# Altium PCB Baby_Temp_Monitor.PcbDoc
Units mm, origin at the board's own origin, x right, y up, seen from the top; angles counter-clockwise.
Board outline 62.86 x 53.47 mm, 2 copper layers (Top Layer, Bottom Layer); 17 components, 17 nets, 68 pads, 8 vias.
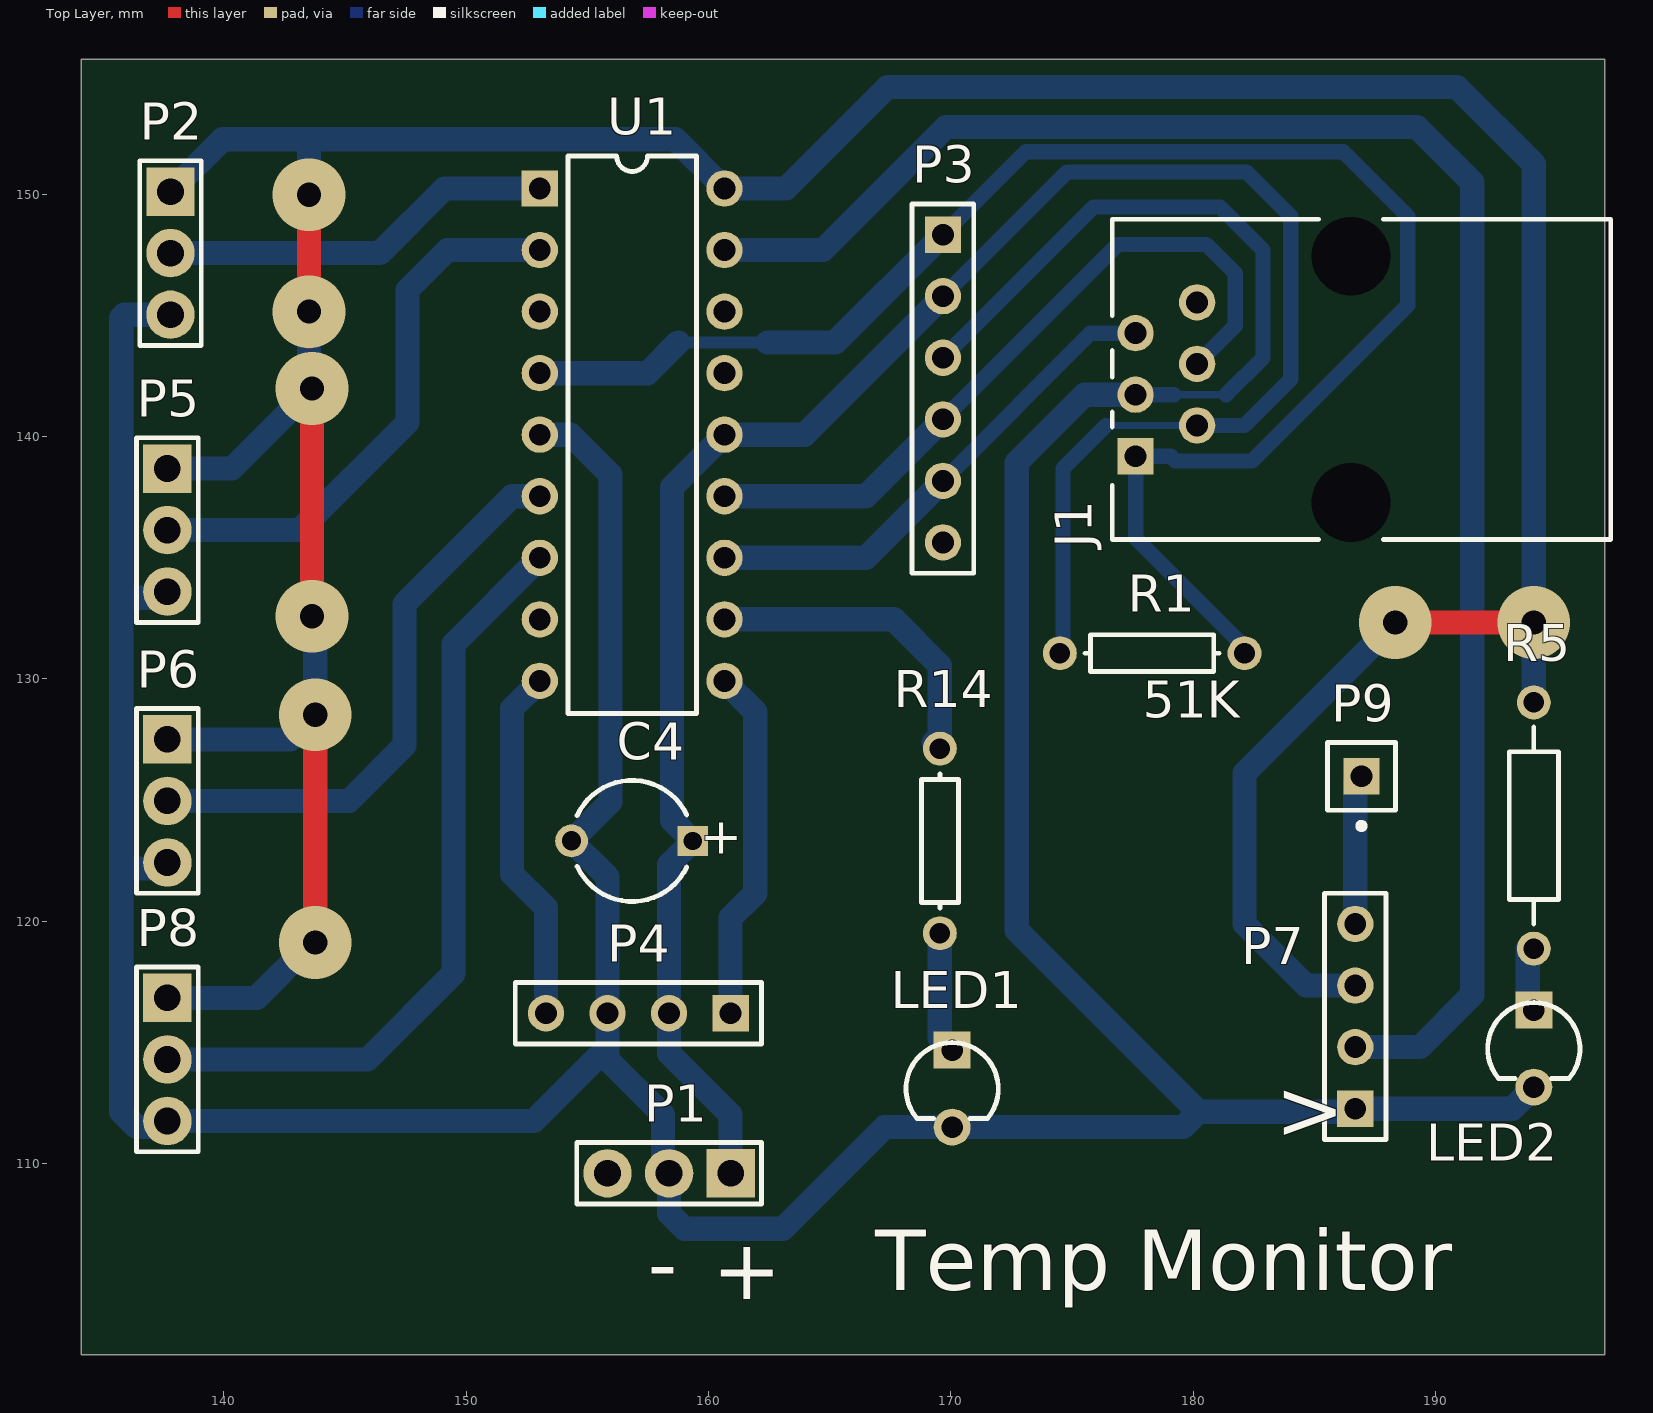
[diagram p0: Top Layer view]
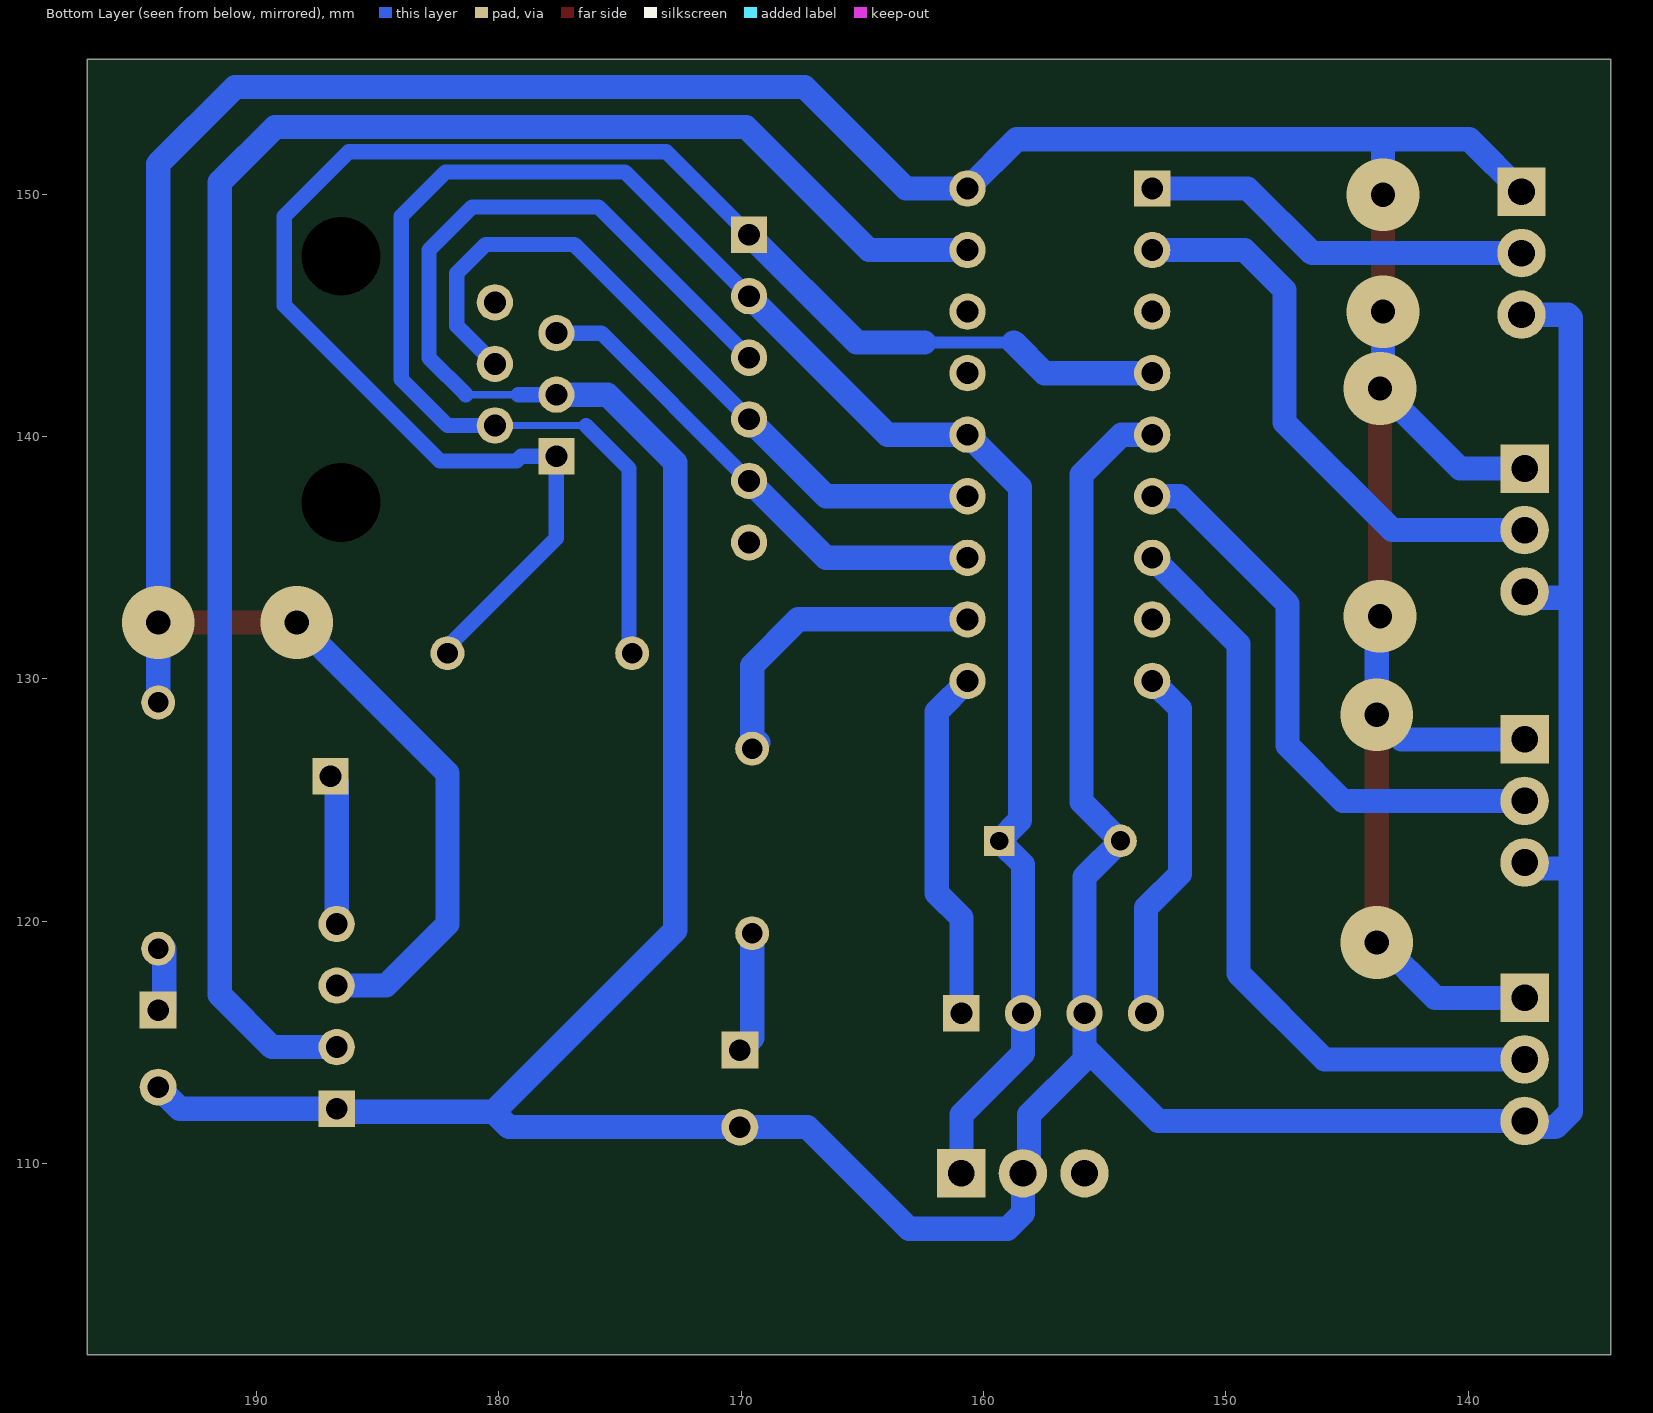
[diagram p1: Bottom Layer view, seen from below]

## Layer stack, top to bottom
Top Layer: signal copper 0.0356
Dielectric: dielectric 0.32, FR-4, Dk 4.8
Bottom Layer: signal copper 0.0356

## Board outline
134.112,102.108 196.977,102.108 196.977,155.575 134.112,155.575

## Design rules (kind name [scope] priority, off if disabled: settings)
Clearance [All] p1: gap=0.203
ComponentClearance [All] p1: gap=0.254 collisioncheckmode=3 verticalgap=0.254
ComponentClearance ComponentClearance_1 [All] p2: gap=0.254 collisioncheckmode=0 verticalgap=0.254
FanoutControl Fanout_LCC [IsLCC] p1: bgadir=Out bgaviamode=Centered fanoutstyle=Auto fanoutdirection=Alternating viagrid=0.025 // Fanout_LCC (Default Rule)
FanoutControl Fanout_BGA [IsBGA] p2: bgadir=Out bgaviamode=Centered fanoutstyle=Auto fanoutdirection=Alternating viagrid=0.025 // Fanout_BGA (Default Rule)
FanoutControl Fanout_Small [(CompPinCount < 5)] p3: bgadir=Out bgaviamode=Centered fanoutstyle=Auto fanoutdirection=OutThenIn viagrid=0.025 // Fanout_Small (Default Rule)
FanoutControl Fanout_SOIC [IsSOIC] p4: bgadir=Out bgaviamode=Centered fanoutstyle=Auto fanoutdirection=Alternating viagrid=0.025 // Fanout_SOIC (Default Rule)
FanoutControl Fanout_BGA_1 [IsBGA] p6: bgadir=Out bgaviamode=Centered fanoutstyle=Auto fanoutdirection=Alternating viagrid=0.025 // Fanout_BGA (Default Rule)
FanoutControl Fanout_LCC_1 [IsLCC] p7: bgadir=Out bgaviamode=Centered fanoutstyle=Auto fanoutdirection=Alternating viagrid=0.025 // Fanout_LCC (Default Rule)
FanoutControl Fanout_SOIC_1 [IsSOIC] p8: bgadir=Out bgaviamode=Centered fanoutstyle=Auto fanoutdirection=Alternating viagrid=0.025 // Fanout_SOIC (Default Rule)
FanoutControl Fanout_Small_1 [(CompPinCount < 5)] p9: bgadir=Out bgaviamode=Centered fanoutstyle=Auto fanoutdirection=OutThenIn viagrid=0.025 // Fanout_Small (Default Rule)
FanoutControl Fanout_Default_1 [All] p10: bgadir=Out bgaviamode=Centered fanoutstyle=Auto fanoutdirection=Alternating viagrid=0.025 // Fanout_Default (Default Rule)
Height Height_1 [All] p2: minheight=0 maxheight=25.4 prefheight=12.7
HoleSize HoleSize_1 [All] p2: absolutevalues=TRUE maxlimit=2.54 minlimit=0.025 maxpercent=80.000 minpercent=20.000
LayerPairs LayerPairs_1 [All] p2: enforce=TRUE
PasteMaskExpansion PasteMaskExpansion_1 [All] p2: expansion=0
PlaneClearance PlaneClearance_1 [All] p2: clearance=0.508
PolygonConnect [All] p1: connectstyle=Relief reliefconductorwidth=0.254 reliefentries=4 polygonreliefangle="90 Angle"
PolygonConnect PolygonConnect_1 [All] p2: connectstyle=Relief reliefconductorwidth=0.254 reliefentries=4 polygonreliefangle="90 Angle"
RoutingLayers [All] p1: top layer_v5=FALSE bottom layer_v5=TRUE
RoutingPriority RoutingPriority_1 [All] p2: routingpriority=0
RoutingTopology RoutingTopology_1 [All] p2: topology=Shortest
RoutingVias [All] p1: holewidth=1 width=3 viastyle="Through Hole" minholewidth=1 minwidth=2 maxholewidth=1 maxwidth=3
ShortCircuit ShortCircuit_1 [All] p2: allowed=FALSE
SolderMaskExpansion [All] p1: expansion=0.102
SolderMaskExpansion SolderMaskExpansion_1 [All] p2: expansion=0.102
TestPointUsage [All] p1: valid=0 allowmultiple=FALSE
TestPointUsage TestPointUsage_1 [All] p2: valid=0 allowmultiple=FALSE
Testpoint [All] p1: side=15 testpointundercomponent=TRUE minsize=1.016 maxsize=2.54 preferedsize=1.524 minholesize=0 maxholesize=1.016 preferedholesize=0.813 testpointgrid=0.025 style=1023 order=0123456789
Testpoint Testpoint_1 [All] p2: side=15 testpointundercomponent=TRUE minsize=1.016 maxsize=2.54 preferedsize=1.524 minholesize=0 maxholesize=1.016 preferedholesize=0.813 testpointgrid=0.025 style=1023 order=0123456789
UnRoutedNet UnRoutedNet_1 [All] p2:
Width [All] p1: maxlimit=1 minlimit=0.305 preferedwidth=1 minimp=50.000000 maximp=50.000000 favimp=50.000000
12 further rules are at their usual default settings.

## Components (designator, comment, footprint, x,y, rotation, side; value= is the part's Value field where it differs from the comment)
C4 "0.1uF" CAPPR5-5x5 156.845,123.317 r180 top
J1 "95009-2667" 95009-2667 197.231,142.367 r90 top
LED1 "LED_3mm" "LED-Polarized - 3mm" 170.053,114.681 r270 top
LED2 "LED_3mm" "LED-Polarized - 3mm" 194.056,116.332 r270 top
P1 "Header 3" HDR1X3 160.909,109.601 r180 top
P2 "Header 3" HDR1X3 137.795,150.114 r270 top
P3 "Header 6" HDR1X6 169.672,148.336 r270 top
P4 "Header 4" HDR1X4 160.909,116.205 r180 top
P5 "Header 3" HDR1X3 137.668,138.684 r270 top
P6 "Header 3" HDR1X3 137.668,127.508 r270 top
P7 "Header 4" HDR1X4 186.69,112.268 r90 top
P8 "Header 3" HDR1X3 137.668,116.84 r270 top
P9 "Plug" PIN1 186.944,125.984 r180 top
R1 "51K" AXIAL-0.3 178.308,131.064 r0 top
R5 "2k" AXIAL-0.4 194.056,123.952 r90 top
R14 "2k" AXIAL-0.3 169.545,123.317 r90 top
U1 "PIC18F1320-I/P" PDIP300-18 156.845,140.081 r270 top

## Footprints (in the part's own frame and the unit in brackets; to place one, negate y for a bottom-side part, rotate by r counter-clockwise, add the part's x,y. Pads: shape width x height; smd on the part's side, far side on the other; paste and mask are expansions set on the pad)
95009-2667 [mm] "Connector; PCB Jack, Thru-Hole; 1-Port, 6 Positions, 6 Loaded; Unshielded without Lightpipes; Right Angle"
  rect 1.5x1.5 hole 0.9: 1(-3.175,19.61)
  round 1.5 hole 0.9: 2(-1.905,17.07) 3(-0.635,19.61) 4(0.635,17.07) 5(1.905,19.61) 6(3.175,17.07)
  round 2.95 hole 3.25 unplated: MH1(-5.08,10.72) MH2(5.08,10.72)
  silkscreen extent -6.6,0 6.61,20.57
AXIAL-0.3 [mm] "Resistor; 2 Leads"
  round 1.4 hole 0.85: 1(-3.81,0) 2(3.81,0)
  silkscreen extent -2.77,-0.76 2.77,0.76
AXIAL-0.4 [mm] "Resistor; 2 Leads"
  round 1.4 hole 0.85: 1(-5.08,0) 2(5.08,0)
  silkscreen extent -4.06,-1.02 4.06,1.02
CAPPR5-5x5 [mm] "Capacitor, Electrolytic, Radial; Body 5 x 5 mm (Dia.xH typ); Pin Spacing 5 mm (typ)"
  rect 1.25x1.25 hole 0.75: 1(-2.5,0)
  round 1.35 hole 0.8: 2(2.5,0)
  silkscreen extent -2.26,-2.5 2.27,2.5
HDR1X3 [mm] "Connector; Header; 3 Position"
  rect 2x2 hole 1.1: 1(0,0)
  round 2 hole 1.1: 2(2.54,0) 3(5.08,0)
  silkscreen extent -1.27,-1.27 6.35,1.27
HDR1X4 [mm] "Connector; Header; 4 Position"
  rect 1.5x1.5 hole 0.9: 1(0,0)
  round 1.5 hole 0.9: 2(2.54,0) 3(5.08,0) 4(7.62,0)
  silkscreen extent -1.27,-1.27 8.89,1.27
HDR1X6 [mm] "Connector; Header; 6 Position"
  rect 1.5x1.5 hole 0.9: 1(0,0)
  round 1.5 hole 0.9: 2(2.54,0) 3(5.08,0) 4(7.62,0) 5(10.16,0) 6(12.7,0)
  silkscreen extent -1.27,-1.27 13.97,1.27
"LED-Polarized - 3mm" [mil]
  rect 60x60 hole 35: A(0,0)
  round 60 hole 35: K(125,0)
  silkscreen extent -12,-75 111,75
PDIP300-18 [mm] "DIP, Plastic; 18 Leads; Row Spacing 7.62 mm; Pitch 2.54 mm"
  rect 1.5x1.5 hole 0.9: 1(-10.16,-3.81)
  round 1.5 hole 0.9: 2(-7.62,-3.81) 3(-5.08,-3.81) 4(-2.54,-3.81) 5(0,-3.81) 6(2.54,-3.81) 7(5.08,-3.81) 8(7.62,-3.81) 9(10.16,-3.81) 10(10.16,3.81) 11(7.62,3.81) 12(5.08,3.81) 13(2.54,3.81) 14(0,3.81) 15(-2.54,3.81) 16(-5.08,3.81) 17(-7.62,3.81) 18(-10.16,3.81)
  silkscreen extent -11.5,-2.65 11.5,2.65
PIN1 [mm] "Generic Antenna; 1 Lead"
  rect 1.5x1.5 hole 0.9: 1(0,0)
  silkscreen extent -1.4,-1.4 1.4,2.17

## Part data
C4: library part "Cap Pol1", "Polarized Capacitor (Radial)"
J1: "Right Angle, Standard Profile, Flush Mount PCB Jack"
LED1 LED2: "3mm LED"
P1 P2 P5 P6 P8: "Header, 3-Pin"
P3: "Header, 6-Pin"
P4 P7: "Header, 4-Pin"
R1 R5 R14: library part Res2, "Resistor"
U1: "High Performance, Enhanced FLASH Microcontroller with 10-Bit A/D and nanoWatt Technology, 8K FLASH, 18-Pin PDIP, Standard Volt Range, Industrial Temperature"

## Via types
v1: diameter 3, hole 1, Top Layer to Bottom Layer, 8 vias

## Nets (pads, with @x,y where several pads share a name; then routed paths per layer and width w, separated by ;. In a path a pad name is that pad's centre, name@x,y a point inside that pad or via, vN(x,y) a via of type N, cw(c..) or ccw(c..) an arc to the next point about the centre after c; other vN are vias at no path point)
NetLED1_A: LED1.A R14.1 | length 5
  Bottom Layer w1: R14.1 169.545,115.189 LED1.A
NetLED2_A: LED2.A R5.1 | length 2.5
  Bottom Layer w1: LED2.A@193.802,116.332 R5.1@193.802,118.872
NetR14_2: R14.2 U1.11 | length 13.5
  Bottom Layer w1: U1.11 167.64,132.461 169.545,130.556 R14.2 R14.2@169.291,127.381
PGC: J1.5 P3.5 U1.12 | length 20.6
  Bottom Layer w0.635: P3.5@169.799,138.303 175.768,144.272 J1.5
  Bottom Layer w1: U1.12 166.497,135.001 P3.5
PGD: J1.4 P3.4 U1.13 | length 30.1
  Bottom Layer w0.635: P3.4@169.799,140.843 176.886,147.93 180.543,147.93 181.737,146.736 181.737,144.578 J1.4
  Bottom Layer w1: U1.13 166.497,137.541 P3.4
PIC_RX: P4.1 U1.10 | length 14.7
  Bottom Layer w1: U1.10 161.925,128.651 161.925,121.158 160.909,120.142 P4.1
PIC_TX: P4.4 U1.9 | length 14.8
  Bottom Layer w1: U1.9 151.892,128.778 151.892,121.956 153.289,120.559 P4.4
RF_ANT: P7.4 P9.1 | length 6.2
  Bottom Layer w1: P7.4 186.69,125.73 P9.1
RF_DATA: P7.2 U1.17 | length 73.2
  Bottom Layer w1: U1.17 164.719,147.701 169.799,152.781 189.23,152.781 191.516,150.495 191.516,116.967 189.357,114.808 P7.2
RF_VCC: P2.1 P5.1 P6.1 P7.3 P8.1 R5.2 U1.18 | length 164.5
  Top Layer w1: v1@143.51,144.145 v1(143.51,149.987) ; v1(143.637,132.588) v1(143.637,141.986) ; v1(143.764,119.126) v1(143.764,128.524) ; v1(188.341,132.334) v1(194.056,132.334)
  Bottom Layer w1: P8.1 141.351,116.84 143.637,119.126 v1(143.764,119.126) ; P5.1 140.335,138.684 v1(143.637,141.986) 143.51,142.113 v1(143.51,145.161) ; P2.1 139.954,152.273 158.623,152.273 U1.18 163.195,150.241 167.386,154.432 190.881,154.432 194.056,151.257 R5.2 ; P6.1@137.922,127.508 142.748,127.508 v1(143.764,128.524) 143.764,132.461 v1(143.637,132.588) ; v1(143.51,149.987) 143.51,152.273 ; P7.3 184.658,117.348 182.118,119.888 182.118,126.111 v1(188.341,132.334)
VDD: C4.1 J1.2 P1.1 P3.2 P4.2 R1.1 U1.14 | length 86.8
  Bottom Layer w0.305: 176.403,140.462 J1.2
  Bottom Layer w0.635: P3.2@169.799,145.923 174.798,150.922 182.199,150.922 184.023,149.098 184.023,142.367 182.118,140.462 J1.2 ; R1.1@174.625,131.191 174.625,138.684 176.403,140.462
  Bottom Layer w1: P1.1 160.909,112.014 158.369,114.554 158.369,122.341 C4.1 158.496,124.166 158.496,137.922 U1.14 163.957,140.081 P3.2
VOUT_SENSOR1: P2.2 U1.1 | length 16.3
  Bottom Layer w1: P2.2 146.431,147.574 149.098,150.241 U1.1
VOUT_SENSOR2: P5.2 U1.2 | length 23.4
  Bottom Layer w1: P5.2 143.129,136.144 147.574,140.589 147.574,146.05 149.225,147.701 U1.2
VOUT_SENSOR3: P6.2 U1.6 | length 24
  Bottom Layer w1: P6.2 145.161,124.968 147.447,127.254 147.447,133.096 151.892,137.541 U1.6
VOUT_SENSOR4: P8.2 U1.7 | length 31.9
  Bottom Layer w1: P8.2 145.923,114.3 149.479,117.856 149.479,131.445 U1.7
VPP: J1.1 P3.1 R1.2 U1.4 | length 68.1
  Bottom Layer w0.5: 158.75,143.891 162.433,143.891
  Bottom Layer w0.635: P3.1@169.799,148.463 173.096,151.76 186.187,151.76 188.849,149.098 188.849,145.415 182.43,138.996 179.266,138.996 179.07,139.192 J1.1 177.621,135.815 R1.2@182.245,131.191
  Bottom Layer w1: U1.4 157.48,142.621 158.75,143.891 ; 162.433,143.891 165.227,143.891 P3.1
VSS: C4.2 J1.3 LED1.K LED2.K P1.2 P2.3 P3.3 P4.3 P5.3 P6.3 P7.1 P8.3 U1.5 | length 198
  Bottom Layer w0.305: 179.197,141.732 181.356,141.732
  Bottom Layer w0.635: P3.3@169.799,143.383 175.895,149.479 181.102,149.479 182.88,147.701 182.88,143.256 181.356,141.732 ; J1.3 179.197,141.732
  Bottom Layer w1: 135.763,122.174 P6.3@137.795,122.174 ; 135.763,133.477 135.89,133.35 P5.3@137.795,133.35 ; P8.3 152.781,111.76 155.829,114.808 ; P8.3@137.795,111.506 136.398,111.506 135.763,112.141 135.763,144.907 135.89,145.034 P2.3 ; U1.5 154.305,140.081 155.956,138.43 155.956,124.928 C4.2 155.829,121.833 155.829,114.3 158.115,112.014 P1.2@158.115,109.601 ; P1.2 158.369,107.95 159.004,107.315 163.068,107.315 167.259,111.506 179.578,111.506 180.213,112.141 ; J1.3 175.514,141.732 172.72,138.938 172.72,119.634 180.213,112.141 ; LED2.K 193.167,112.268 P7.1 186.563,112.141 180.213,112.141
pads on no net: J1.6 J1.MH1 J1.MH2 P1.3 P3.6 U1.3 U1.8 U1.15 U1.16

## Silkscreen, mask and mechanical layers (free items; w line width, h text height)
Top Overlay:
  text ">" at 183.388,110.998 h2.5
  text "Temp Monitor" at 166.878,104.775 h2.5
  text "-" at 157.48,104.648 h2.5
  text "+" at 160.147,104.394 h2.5
Mechanical 1:
  the board outline again, w0.254
Mechanical 16:
  drawing of 1872 lines, arcs and shapes, not listed
  text "1" at 36.246,189.611 h1.78
  text "2" at 108.89,189.611 h1.78
  text "3" at 182.042,189.611 h1.78
  text "4" at 254.94,189.611 h1.78
  text "A" at 1.905,166.599 h1.78
  text "B" at 136.144,163.627 h1.78
  text "A" at 167.386,158.598 h1.78
  text "REV:" at 59.944,135.255 h1.14
  text "B" at 1.905,118.542 h1.78
  text "C" at 1.905,70.028 h1.78
  text "ENGINEER:" at 173.99,33.02 h1.14
  text "TITLE:" at 212.09,33.02 h1.14
  text "PCB DESIGNER:" at 173.99,25.527 h1.14
  text "D" at 1.905,22.022 h1.78
  text "DATE:" at 173.99,17.78 h1.14
  text "PART NO.:" at 212.09,17.78 h1.14
  text "Altium Limited" at 140.97,15.24 h1.78
  text ".PRINT_DATE" at 175.26,14.732 h1.78
  text "12a Rodborough Rd" at 140.97,12.7 h1.78
  text "Frenchs Forest" at 140.97,10.16 h1.78
  text "FILE NAME:" at 173.99,10.16 h1.14
  text "DWG NO:" at 212.09,10.16 h1.14
  text "SCALE:" at 265.43,10.16 h1.14
  text "NSW 2086" at 140.97,7.62 h1.78
  text ".PCB_FILE_NAME_NO_PATH" at 175.26,7.112 h1.78
  text "1" at 36.246,1.651 h1.78
  text "2" at 108.89,1.651 h1.78
  text "3" at 182.042,1.651 h1.78
  text "4" at 254.94,1.651 h1.78

## Text inside footprints (layer, text, board x,y; h text height)
C4: Top Overlay "+" at 161.395,124.067 h1.5 r180